# Altium PCB buck.PcbDoc
Units mil, origin at the board's own origin, x right, y up, seen from the top; angles counter-clockwise.
Board outline 3385 x 2755 mil, 2 copper layers (Top Layer, Bottom Layer); 40 components, 24 nets, 92 pads, 382 vias.
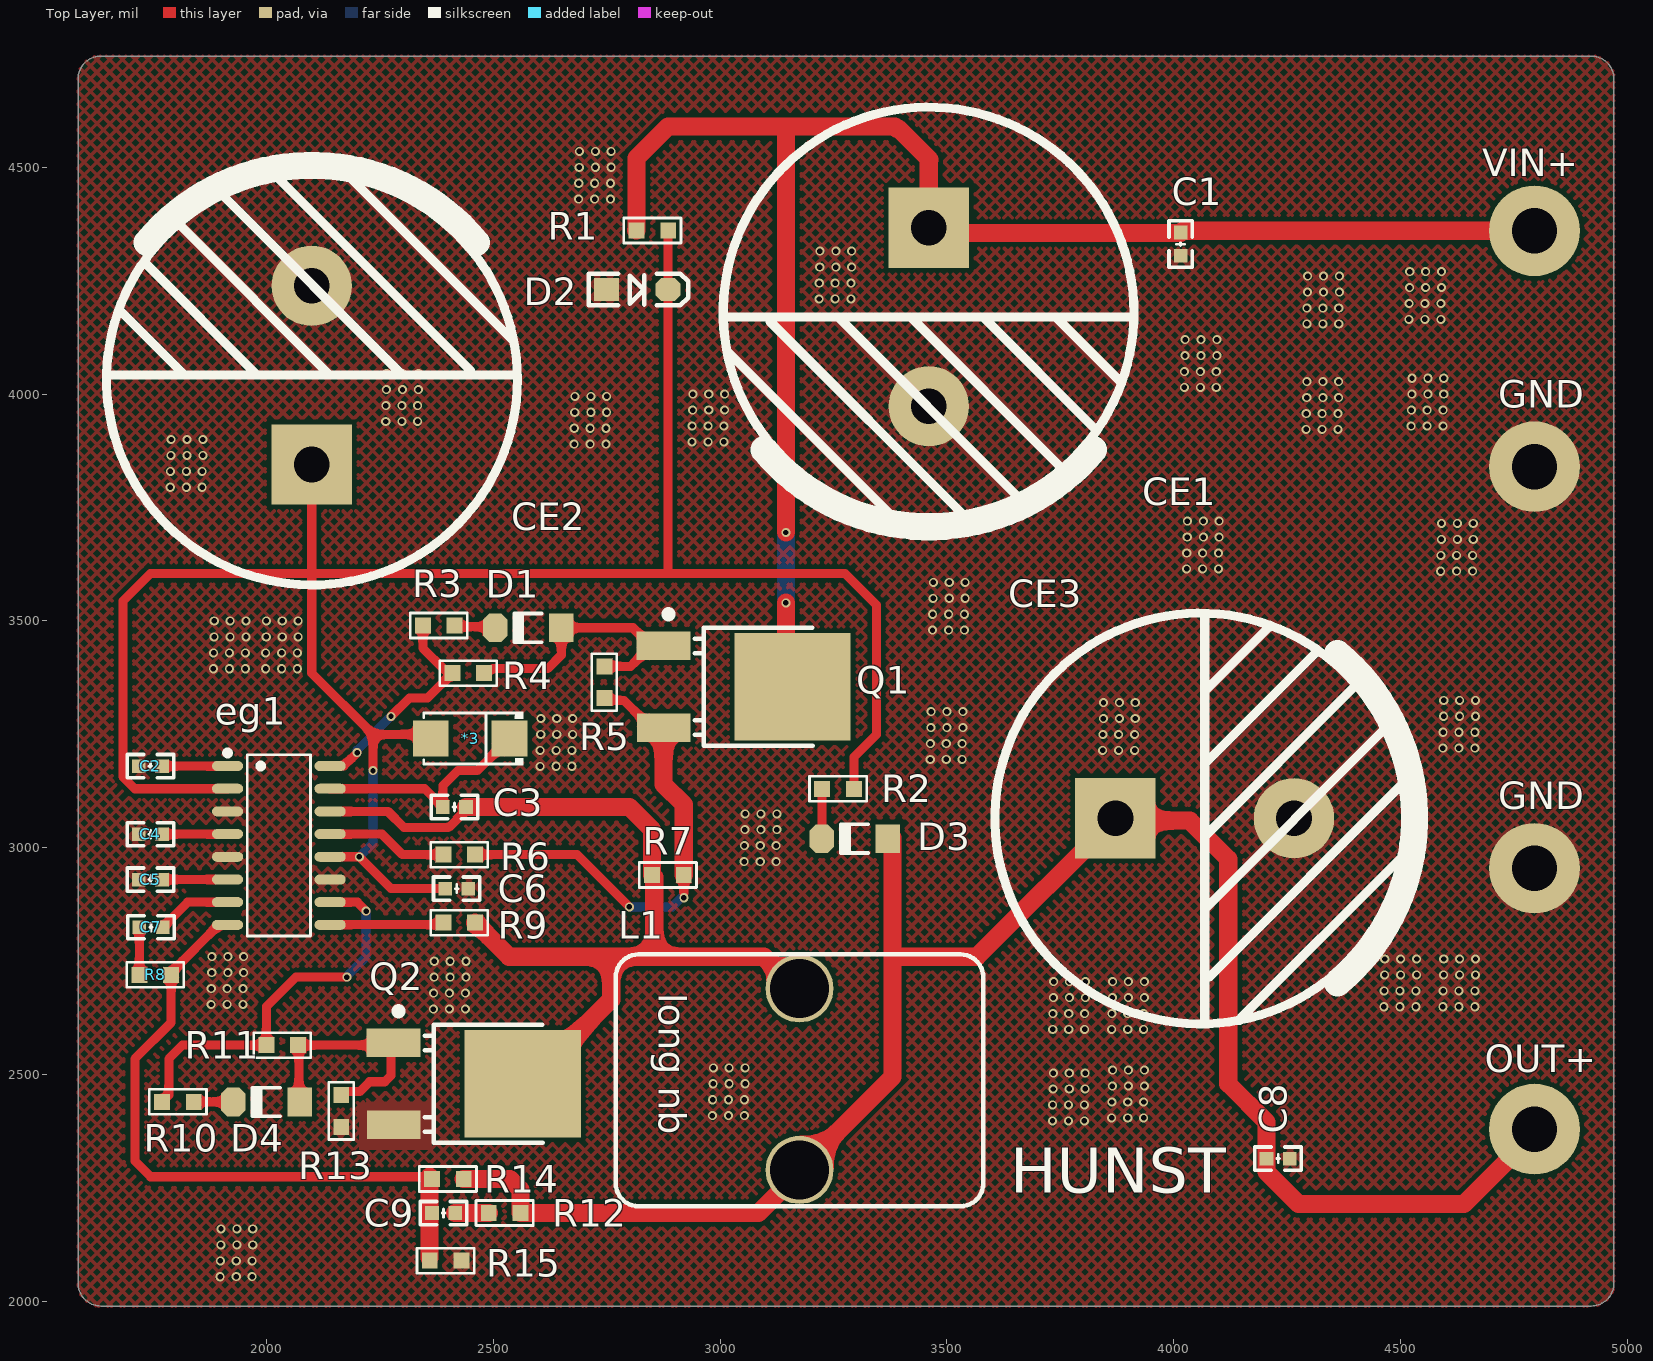
[diagram p0: Top Layer view]
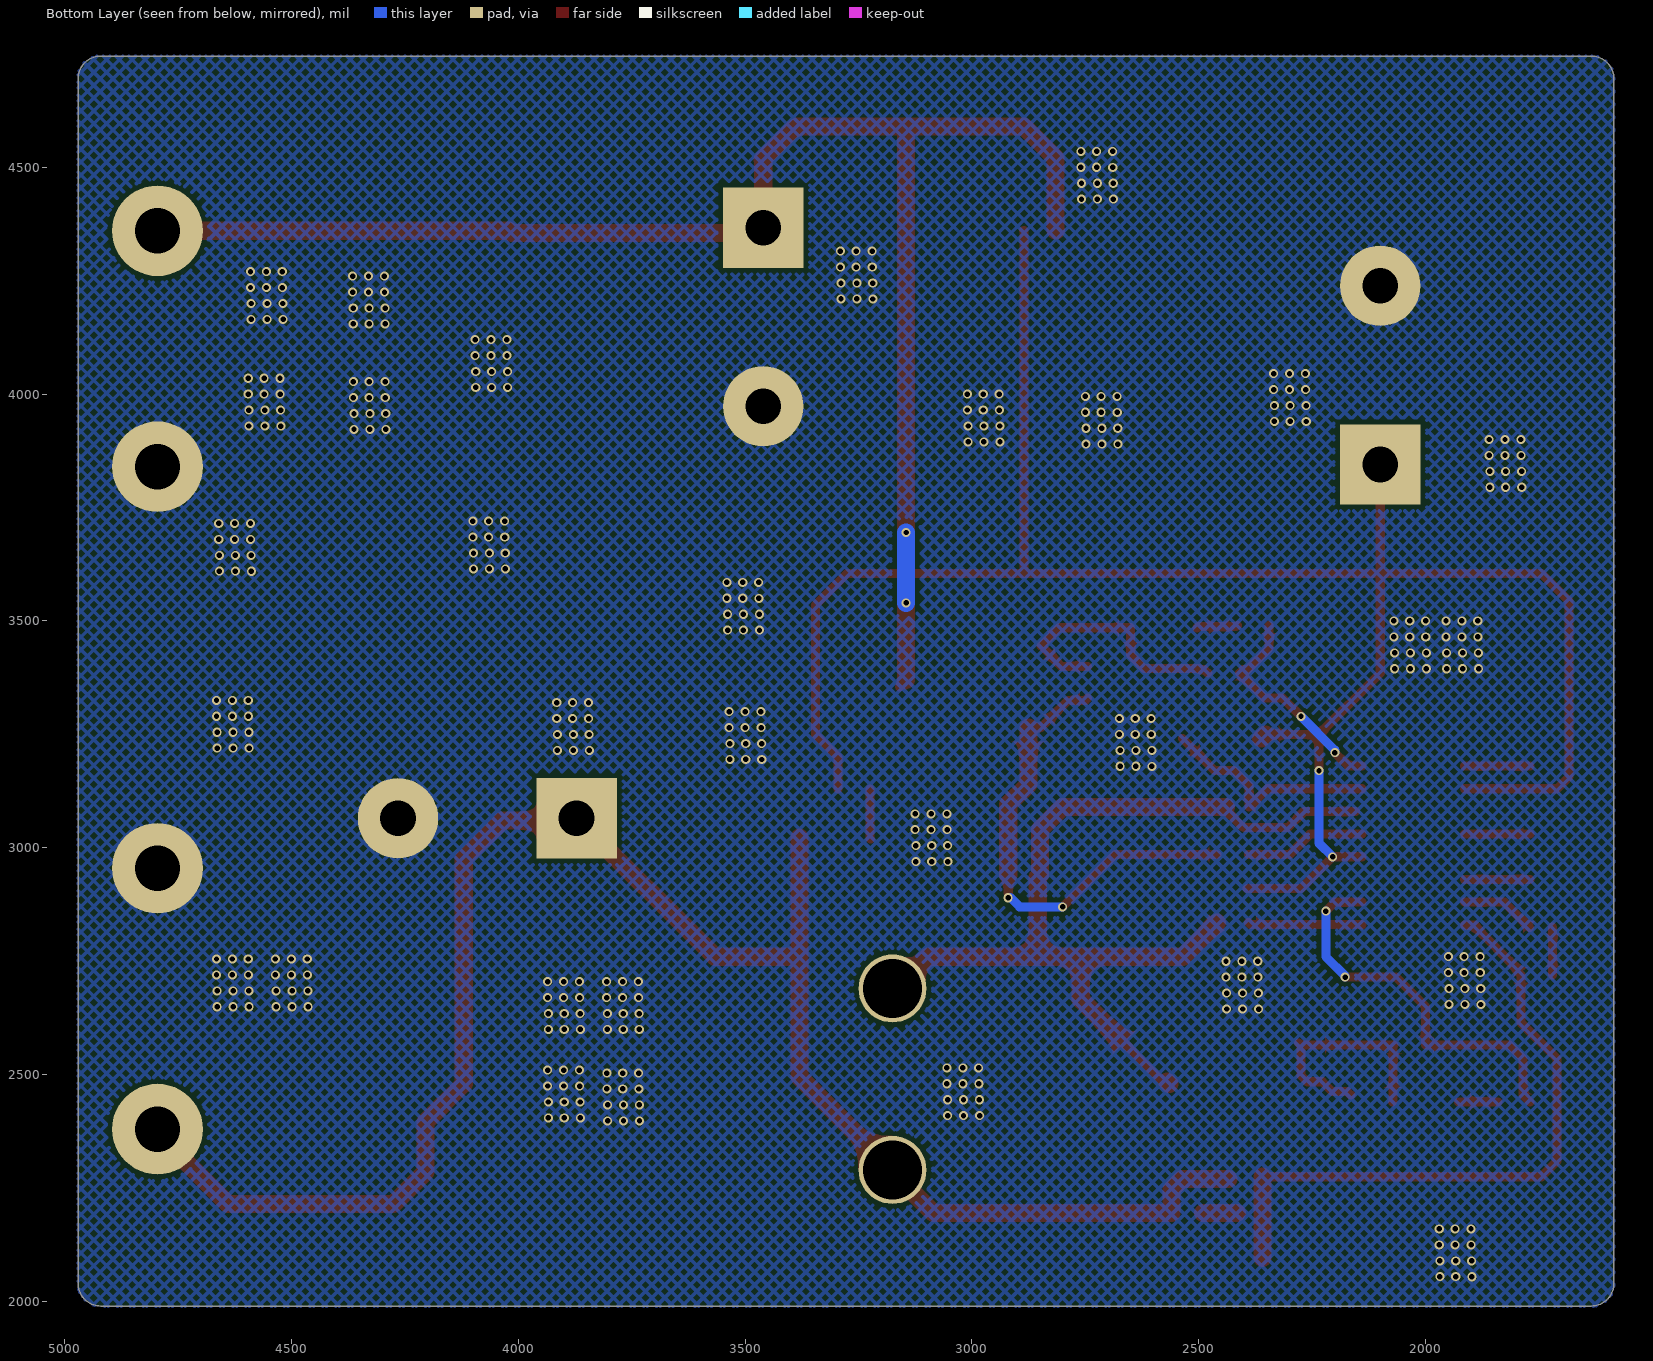
[diagram p1: Bottom Layer view, seen from below]
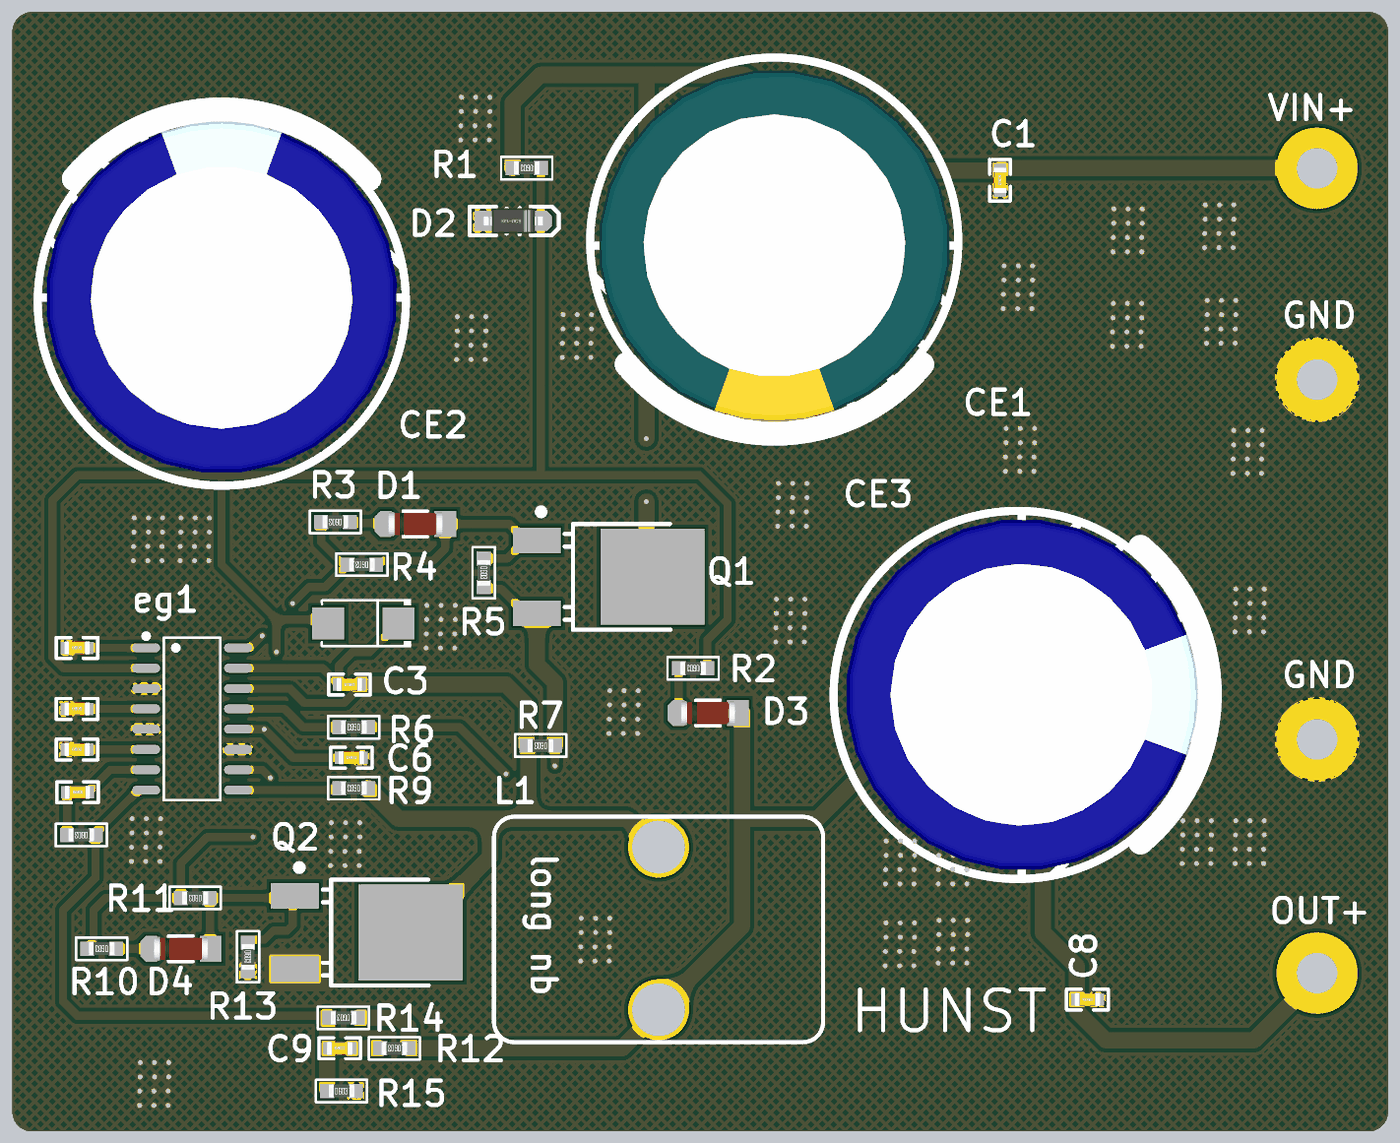
[diagram p2: 3D render of the assembled board from above, using the file's embedded part models]

## Layer stack, top to bottom
Top Solder: solder mask 0.4, Solder Resist, Dk 3.5
Top Layer: signal copper 1.4
Dielectric 1: dielectric 12.6, FR-4, Dk 4.8
Bottom Layer: signal copper 1.4
Bottom Solder: solder mask 0.4, Solder Resist, Dk 3.5

## Board outline
1635,1990 cw(c1635,2040) 1585,2040 1585,4695 cw(c1635,4695) 1635,4745 4920,4745 cw(c4920,4695) 4970,4695 4970,2040 cw(c4920,2040) 4920,1990

## Design rules (kind name [scope] priority, off if disabled: settings)
Clearance [All] p1: gap=10 ignorepadtopadclearanceinfootprint=FALSE except(0: Arc-Hole Track-Hole SMDPad-Hole THPad-Hole Via-Hole Fill-Hole Poly-Hole Region-Hole Text-Hole)
ComponentClearance [All] p1: gap=0 collisioncheckmode=3 verticalgap=10 showdistances=FALSE
Height [All] p1: minheight=0 maxheight=2000 prefheight=500
HoleSize [All] p1: absolutevalues=TRUE maxlimit=200 minlimit=1 maxpercent=80.000 minpercent=20.000
PolygonConnect PolygonConnect_1 [InNet('GND')] p1: connectstyle=Direct reliefconductorwidth=10 reliefentries=4 polygonreliefangle="90 Angle" airgapwidth=10
PolygonConnect [All] p2: connectstyle=Relief reliefconductorwidth=10 reliefentries=4 polygonreliefangle="90 Angle" airgapwidth=10
RoutingVias [All] p1: holewidth=28 width=50 viastyle="Through Hole" minholewidth=28 minwidth=50 maxholewidth=28 maxwidth=50
SilkToSilkClearance [All] p1: silktosilkclearance=0
SilkToSolderMaskClearance [IsPad] p1: minsilkscreentomaskgap=0 clearancetoexposedcopper=TRUE
SolderMaskExpansion [All] p1: expansion=4 istentingtop=FALSE
Width [All] p1: maxlimit=50 minlimit=20 preferedwidth=20 minimp=50.000000 maximp=50.000000 favimp=50.000000
25 further rules are at their usual default settings.

## Components (designator, comment, footprint, x,y, rotation, side; value= is the part's Value field where it differs from the comment)
*3 "SS520" SS520 2445,3235 r180 top
C1 "1uf/200V" "C 0603_L" 4015,4330.59 r90 top
C2 "1uf" "C 0603_L" 1744.42,3180 r0 top
C3 "1uf" "C 0603_L" 2414.41,3090 r180 top
C4 "100pf" "C 0603_L" 1744.42,3030 r0 top
C5 "200pf" "C 0603_L" 1744.41,2930 r0 top
C6 "0.1uf" "C 0603_L" 2419.41,2910 r0 top
C7 "10nf" "C 0603_L" 1745.6,2825 r0 top
C8 "1uf" "C 0603_L" 4230,2315 r180 top
C9 "10nf" "C 0603_L" 2390.59,2195 r0 top
CE1 "100uF/200V" "CAP 10*22*40 - GD" 3460,4170 r270 top
CE2 "22uf" "CAP 10*22*31.5" 2100,4041.85 r90 top
CE3 "1000uF/25V" "CAP 10*22*31.5" 4068.15,3065 r0 top
D1 "1N4148" "MINI_MELF (LL34)" 2576.97,3485 r180 top
D2 "稳压二极管" SOD-123 2817.5,4230.59 r0 top
D3 "1N4148" "MINI_MELF (LL34)" 3296.97,3020 r180 top
D4 "1N4148" "MINI_MELF (LL34)" 2000,2440 r180 top
eg1 "eg1163s" eg1163S 2035,3005 r270 top
GND "GND" 焊盘接口 4795,2955 r0 top (schematic designator *2)
GND "GND" 焊盘接口 4795,3840 r0 top (schematic designator *2)
L1 "220uh" 电感 3175,2490 r270 top
OUT+ "VO+19.2V" 焊盘接口 4795,2380 r0 top (schematic designator *4)
Q1 "IRFR220NTRPBF" IRFR220NTRPBF 2997.95,3354.99 r90 top
Q2 "IRFR220NTRPBF" IRFR220NTRPBF 2402.95,2479.99 r90 top
R1 "200K" "RES 0603" 2850.65,4360.59 r180 top
R2 "51R" "RES 0603" 3260,3130 r180 top
R3 "2R" "RES 0603" 2380,3490 r180 top
R4 "100R" "RES 0603" 2445,3385 r180 top
R5 "100K" "RES 0603" 2745,3365 r270 top
R6 "10K" "RES 0603" 2425,2985 r180 top
R7 "36mR" "RES 0603" 2885,2940 r180 top
R8 "100K" "RES 0603" 1755,2720 r180 top
R9 "100K" "RES 0603" 2425,2835 r180 top
R10 "2R" "RES 0603" 1805,2440 r180 top
R11 "100R" "RES 0603" 2035,2565 r180 top
R12 "1.5K" "RES 0603" 2525,2195 r180 top
R13 "100K" "RES 0603" 2165,2420 r270 top
R14 "18K" "RES 0603" 2400,2270 r180 top
R15 "1.2K" "RES 0603" 2395,2090 r0 top
VIN+ "VIN+150V" 焊盘接口 4795,4360 r0 top (schematic designator *1)

## Footprints (in the part's own frame and the unit in brackets; to place one, negate y for a bottom-side part, rotate by r counter-clockwise, add the part's x,y. Pads: shape width x height; smd on the part's side, far side on the other; paste and mask are expansions set on the pad)
"C 0603_L" [mil] "无极性贴片电容"
  rect 30x30 smd: 1(-25.59,0) 2(25.59,0)
  silkscreen extent -51,-26 51,26, body extent -31,-16 31,16, height 32
"CAP 10*22*31.5" [mm] "脚距10mm直径22mm高度31.5mm"
  rect 4.5x4.5 hole 2: 1(-5,0)
  round 4.5 hole 2: 2(5,0)
  silkscreen extent -11.75,-11.51 11.74,11.48, body extent -11,-11 11.01,11, height 31.53
"CAP 10*22*40 - GD" [mm] "脚距10mm直径22mm高度40mm"
  rect 4.5x4.5 hole 2: 1(-5,0)
  round 4.5 hole 2: 2(5,0)
  silkscreen extent -11.75,-11.51 11.74,11.49, body extent -11,-11 11.01,11, height 40.04
eg1163S [mm]
  oval 0.56x1.745 smd: 1(-4.452,-3.064) 2(-3.182,-3.064) 3(-1.912,-3.064) 4(-0.642,-3.064) 5(0.628,-3.064) 6(1.898,-3.064) 7(3.168,-3.064) 8(4.438,-3.064) 9(4.438,2.68) 10(3.168,2.68) 11(1.898,2.68) 12(0.628,2.68) 13(-0.642,2.68) 14(-1.912,2.68) 15(-3.182,2.68) 16(-4.452,2.68)
  silkscreen extent -5.33,-3.21 5.07,1.58
IRFR220NTRPBF [mm]
  rect 1.6x3 smd: 1(2.285,3.118) 3(-2.285,3.112)
  rect 6x6.5 smd: 2(0,-4.116)
  silkscreen extent -3.3,-5.24 4.26,3.04
"MINI_MELF (LL34)" [mm] "1.5*3.4mm(直径，脚距）"
  rect 1.37x1.62 smd: 1(-1.855,0)
  oct 1.37x1.62 smd: 2(1.855,0)
  silkscreen extent -0.76,-0.8 0.78,0.8, body extent -1.7,-0.75 1.7,0.75, height 1.5
"RES 0603" [mil] "Chip Resistor, 2-Leads, Body 1.60x0.80mm"
  rect 35x35 smd: 1(-35,0) 2(35,0)
  silkscreen extent -63,-28 63,28, body extent -31,-16 31,16, height 18
SOD-123 [mil] "2.7x1.6X1.1mm（长宽高，不包括引脚）"
  rect 55x50 smd: 1(-67.5,0)
  oct 55x50 smd: 2(67.5,0)
  silkscreen extent -108,-35 112,35, body extent -73,-31 73,31, height 48
SS520 [mm]
  rect 2x2 smd: 1(-2.302,-0.148) 2(2.098,-0.148)
  silkscreen extent -3.08,-1.65 2.5,1.35
焊盘接口 [mil]
  round 200 hole 100: 1(0,0)
电感 [mil]
  round 150 hole 130: 1(-200,0) 2(200,0)
  silkscreen extent -275,-405 280,405

## Part data
C1 C2 C3 C4 C5 C6 C7 C8 C9: library part C, "贴片电容", BOM名称=无极性贴片电容, 唯一出售店铺网址=https://shop463601444.taobao.com, 淘宝ID="封装库来自淘宝 ID：黄晶宝石", 联系售后，技术支持=https://shop463601444.taobao.com
CE1 CE2 CE3: library part CE, "直插电解电容", BOM名称=直插电解电容, 淘宝ID="封装库来自淘宝 ID：黄晶宝石", 联系售后=https://shop463601444.taobao.com
D1 D3 D4: "开关二极管", BOM名称=高速开关二极管, 欢迎光临=https://shop463601444.taobao.com, 淘宝ID="封装库来自淘宝 ID：黄晶宝石"
D2: "Zener Diode", 封装库来自淘宝卖家 ID：黄晶宝石=其他店铺购入均为盗版，不享受售后技术支持服务，请立即申请退款
GND GND OUT+ VIN+: library part 焊盘接口
L1: library part 电感
Q1 Q2: Continuous Drain Current (Id)=5A, Drain Source On Resistance (RDS(on)@Vgs,Id)=600mΩ@10V,2.9A, Drain Source Voltage (Vdss)=200V, Gate Threshold Voltage (Vgs(th)@Id)=4V@250uA, Input Capacitance (Ciss@Vds)=300pF@25V, LCSC Part Name="1个N沟道 耐压:200V 电流:5A", Manufacturer=Infineon(英飞凌), Operating Temperature=-55℃~+175℃@(Tj), Power Dissipation (Pd)=43W, Add into BOM=yes, Convert to PCB=yes, Datasheet=https://atta.szlcsc.com/upload/public/pdf/source/20200323/C500528_AD38F318A115118F4DB56F5A4EA6919E.pdf, Device=IRFR220NTRPBF, Manufacturer Part=IRFR220NTRPBF, Name=IRFR220NTRPBF, Supplier=LCSC, Supplier Footprint=TO-252-2(DPAK), Supplier Part=C2584, Symbol=IRFR220N, Total Gate Charge (Qg@Vgs)=23nC@10V, Type=1个N沟道
R1 R2 R3 R4 R5 R6 R7 R8 R9 R10 R11 R12 R13 R14 R15: library part R, "贴片电阻", BOM名称=贴片电阻, 封装库来自淘宝卖家 ID：黄晶宝石=其他店铺购入均为盗版，不享受售后技术支持服务，请立即申请退款, 版权归属="来自淘宝 ID：黄晶宝石", 联系售后=https://shop463601444.taobao.com

## Via types
v1: diameter 20, hole 12, Top Layer to Bottom Layer, tented both sides, 382 vias

## Nets (pads, with @x,y where several pads share a name; then routed paths per layer and width w, separated by ;. In a path a pad name is that pad's centre, name@x,y a point inside that pad or via, vN(x,y) a via of type N, cw(c..) or ccw(c..) an arc to the next point about the centre after c; other vN are vias at no path point)
+5: C2.2 eg1.1 | length 144.5
  Top Layer w20: C2.2 1770.13,3180.13 1914.22,3180.13 eg1.1
GND: C1.1 C2.1 C4.1 C5.1 C6.2 C8.1 CE1.2 CE2.2 CE3.2 D2.1 eg1.3 eg1.5 eg1.11 GND.1 Q2.3 R13.2 R15.2
  other v1: 1898.12,2054.65 1933.49,2054.73 1968.49,2054.73 1898.49,2089.73 1933.49,2089.73 1968.49,2089.73 1899.63,2124.92 1935,2125 1970,2125 1900,2160 1935,2160 1970,2160 3732.6,2398.19 3767.97,2398.27 3802.97,2398.27 3863.12,2404.65 3898.49,2404.73 3933.49,2404.73 2983.12,2409.65 3018.49,2409.73 3053.49,2409.73 3732.97,2433.27 3767.97,2433.27 3802.97,2433.27 3863.49,2439.73 3898.49,2439.73 3933.49,2439.73 2983.49,2444.73 3018.49,2444.73 3053.49,2444.73 3734.11,2468.46 3769.48,2468.54 3804.48,2468.54 3864.63,2474.92 3900,2475 3935,2475 2984.63,2479.92 3020,2480 3055,2480 3734.48,2503.54 3769.48,2503.54 3804.48,2503.54 3865,2510 3900,2510 3935,2510 2985,2515 3020,2515 3055,2515 3733.12,2599.65 3768.49,2599.73 3803.49,2599.73 3863.12,2599.65 3898.49,2599.73 3933.49,2599.73 3733.49,2634.73 3768.49,2634.73 3803.49,2634.73 3863.49,2634.73 3898.49,2634.73 3933.49,2634.73 2368.12,2644.65 2403.49,2644.73 2438.49,2644.73 4463.12,2649.65 4498.49,2649.73 4533.49,2649.73 4593.12,2649.65 4628.49,2649.73 4663.49,2649.73 1878.12,2654.65 1913.49,2654.73 1948.49,2654.73 3734.63,2669.92 3770,2670 3805,2670 3864.63,2669.92 3900,2670 3935,2670 2368.49,2679.73 2403.49,2679.73 2438.49,2679.73 4463.49,2684.73 4498.49,2684.73 4533.49,2684.73 4593.49,2684.73 4628.49,2684.73 4663.49,2684.73 1878.49,2689.73 1913.49,2689.73 1948.49,2689.73 3735,2705 3770,2705 3805,2705 3865,2705 3900,2705 3935,2705 2369.63,2714.92 2405,2715 2440,2715 4464.63,2719.92 4500,2720 4535,2720 4594.63,2719.92 4630,2720 4665,2720 1879.63,2724.92 1915,2725 1950,2725 2370,2750 2405,2750 2440,2750 4465,2755 4500,2755 4535,2755 4595,2755 4630,2755 4665,2755 1880,2760 1915,2760 1950,2760 3053.12,2969.65 3088.49,2969.73 3123.49,2969.73 3053.49,3004.73 3088.49,3004.73 3123.49,3004.73 3054.63,3039.92 3090,3040 3125,3040 3055,3075 3090,3075 3125,3075 2603.12,3179.65 2638.49,3179.73 2673.49,3179.73 3463.12,3194.65 3498.49,3194.73 3533.49,3194.73 2603.49,3214.73 2638.49,3214.73 2673.49,3214.73 3843.12,3214.65 3878.49,3214.73 3913.49,3214.73 4593.12,3219.65 4628.49,3219.73 4663.49,3219.73 3463.49,3229.73 3498.49,3229.73 3533.49,3229.73 2604.63,3249.92 2640,3250 2675,3250 3843.49,3249.73 3878.49,3249.73 3913.49,3249.73 4593.49,3254.73 4628.49,3254.73 4663.49,3254.73 3464.63,3264.92 3500,3265 3535,3265 2605,3285 2640,3285 2675,3285 3844.63,3284.92 3880,3285 3915,3285 4594.63,3289.92 4630,3290 4665,3290 3465,3300 3500,3300 3535,3300 3845,3320 3880,3320 3915,3320 4595,3325 4630,3325 4665,3325 1883.12,3394.65 1918.49,3394.73 1953.49,3394.73 1998.12,3394.65 2033.49,3394.73 2068.49,3394.73 1883.49,3429.73 1918.49,3429.73 1953.49,3429.73 1998.49,3429.73 2033.49,3429.73 2068.49,3429.73 1884.63,3464.92 1920,3465 1955,3465 1999.63,3464.92 2035,3465 2070,3465 3468.12,3479.65 3503.49,3479.73 3538.49,3479.73 1885,3500 1920,3500 1955,3500 2000,3500 2035,3500 2070,3500 3468.49,3514.73 3503.49,3514.73 3538.49,3514.73 3469.63,3549.92 3505,3550 3540,3550 3470,3585 3505,3585 3540,3585 4588.12,3609.65 4623.49,3609.73 4658.49,3609.73 4028.12,3614.65 4063.49,3614.73 4098.49,3614.73 4588.49,3644.73 4623.49,3644.73 4658.49,3644.73 4028.49,3649.73 4063.49,3649.73 4098.49,3649.73 4589.63,3679.92 4625,3680 4660,3680 4029.63,3684.92 4065,3685 4100,3685 4590,3715 4625,3715 4660,3715 4030,3720 4065,3720 4100,3720 1788.12,3794.65 1823.49,3794.73 1858.49,3794.73 1788.49,3829.73 1823.49,3829.73 1858.49,3829.73 1789.63,3864.92 1825,3865 1860,3865 2678.12,3889.65 2713.49,3889.73 2748.49,3889.73 2938.12,3894.65 2973.49,3894.73 3008.49,3894.73 1790,3900 1825,3900 1860,3900 4291.56,3922.13 4326.93,3922.21 4361.93,3922.21 2678.49,3924.73 2713.49,3924.73 2748.49,3924.73 2938.49,3929.73 2973.49,3929.73 3008.49,3929.73 4523.12,3929.65 4558.49,3929.73 4593.49,3929.73 2263.12,3939.65 2298.49,3939.73 2333.49,3939.73 4291.93,3957.21 4326.93,3957.21 4361.93,3957.21 2679.63,3959.92 2715,3960 2750,3960 2939.63,3964.92 2975,3965 3010,3965 4523.49,3964.73 4558.49,3964.73 4593.49,3964.73 2263.49,3974.73 2298.49,3974.73 2333.49,3974.73 4293.07,3992.4 4328.44,3992.48 4363.44,3992.48 2680,3995 2715,3995 2750,3995 2940,4000 2975,4000 3010,4000 4524.63,3999.92 4560,4000 4595,4000 2264.63,4009.92 2300,4010 2335,4010 4023.12,4014.65 4058.49,4014.73 4093.49,4014.73 4293.44,4027.48 4328.44,4027.48 4363.44,4027.48 4525,4035 4560,4035 4595,4035 2265,4045 2300,4045 2335,4045 4023.49,4049.73 4058.49,4049.73 4093.49,4049.73 4024.63,4084.92 4060,4085 4095,4085 4025,4120 4060,4120 4095,4120 4293.12,4154.65 4328.49,4154.73 4363.49,4154.73 4518.12,4164.65 4553.49,4164.73 4588.49,4164.73 4293.49,4189.73 4328.49,4189.73 4363.49,4189.73 4518.49,4199.73 4553.49,4199.73 4588.49,4199.73 3218.12,4209.65 3253.49,4209.73 3288.49,4209.73 4294.63,4224.92 4330,4225 4365,4225 4519.63,4234.92 4555,4235 4590,4235 3218.49,4244.73 3253.49,4244.73 3288.49,4244.73 4295,4260 4330,4260 4365,4260 4520,4270 4555,4270 4590,4270 3219.63,4279.92 3255,4280 3290,4280 3220,4315 3255,4315 3290,4315 2688.12,4429.65 2723.49,4429.73 2758.49,4429.73 2688.49,4464.73 2723.49,4464.73 2758.49,4464.73 2689.63,4499.92 2725,4500 2760,4500 2690,4535 2725,4535 2760,4535
kuan: 
Net*1_1: C1.2 CE1.1 Q1.2 R1.2 VIN+.1 | length 3628.2
  Top Layer w20: Q1.2@3145,3370 Q1.2
  Top Layer w40: R1.2@2815,4361.25 R1.2 2815.65,4520.65 2885,4590 3145,4590 ; Q1.2@3145,3370 v1(3145,3540) ; v1(3145,3695) 3145,4590 ; VIN+.1 4020,4360 4015,4355 3471.85,4355 CE1.1 3460,4515 3461.72,4516.72 3393.43,4585 3390,4585 3385,4590 3145,4590 ; VIN+.1@4849,4380 VIN+.1@4869,4360
  Bottom Layer w40: v1(3145,3540) v1(3145,3695)
Net*3_1: *3.1 C3.2 eg1.15 | length 501.7
  Top Layer w20: eg1.15 2348.56,3130.26 C3.2 2388.82,3136.91 2421.91,3170 2464.79,3170 *3.1
Net*3_2: *3.2 C6.1 CE2.1 D2.2 eg1.2 eg1.12 R1.1 R2.1 | length 4871.8
  Top Layer w20: eg1.2 1710.27,3130.26 1683.82,3156.71 1683.82,3543.82 1745,3605 2100,3605 ; CE2.1@2100,3835 2100,3605 ; CE2.1 CE2.1@2110,3835 ; eg1.12 2204.74,2980.26 v1(2205,2980) 2275,2910 C6.1 ; v1@2235,3175 2235,3250 ; *3.2@2353.24,3250 2235,3250 ; R1.1 2885.33,4360.26 2885.33,4230.92 D2.2 2885,3605 ; R2.1 3295,3200 3345,3250 3345,3535 3275,3605 2885,3605 ; 2100,3605 2885,3605 ; 2100,3605 2100,3385 2235,3250
  Top Layer w40: *3.2@2353.24,3250 *3.2
  Bottom Layer w20: v1(2205,2980) 2235,3010 v1(2235,3170)
Net*4_1: C8.2 CE3.1 D3.1 L1.2 OUT+.1 R12.1 R14.1 | length 4092.8
  Top Layer w20: OUT+.1@4869,2390 OUT+.1@4879,2380
  Top Layer w40: R14.1 2536.57,2270 2560,2246.57 R12.1 3085,2195 3175,2285 L1.2 3380,2495 3380,2760 ; D3.1@3380,3023.03 3380,2760 ; OUT+.1 4795,2370 4640,2215 4274.72,2215 4204.41,2285.3 C8.2 4204.41,2395.59 4120,2480 4120,2975 4035,3060 3876.3,3060 CE3.1 3566.3,2760 3380,2760 ; OUT+.1@4825.7,2380 4825.7,2405.7 4825.86,2405.86 OUT+.1@4825.86,2336.86
NetC3_1: C3.1 eg1.14 L1.1 Q2.2 R7.2 R9.1 | length 2166.8
  Top Layer w20: eg1.14@2154.88,3080 2268.06,3080 2303.06,3045 2400,3045 2400.62,3045.62 2402.73,3045.62 2435,3077.9 2435,3085 2436.39,3086.39 C3.1@2441.39,3086.39 ; Q2.2@2574.84,2480 Q2.2@2682.95,2588.11
  Top Layer w40: C3.1 2800,3090 2850,3040 R7.2 ; R9.1 2535.01,2760 2760,2760 ; Q2.2 Q2.2@2570,2485 ; Q2.2@2682.95,2588.11 2760,2665.16 2760,2760 ; R7.2@2855,2935 2855,2760 ; L1.1 3166.57,2690 3096.57,2760 2855,2760 ; 2760,2760 2855,2760
NetC4_2: C4.2 eg1.4 | length 144.5
  Top Layer w20: C4.2 1770.13,3030.13 1914.22,3030.13 eg1.4
NetC5_2: C5.2 eg1.6 | length 144.5
  Top Layer w20: C5.2 1770.13,2930.13 1914.22,2930.13 eg1.6
NetC7_1: C7.1 R8.2 | length 105
  Top Layer w20: R8.2 1720,2727.5 1720,2778.75 C7.1
NetC7_2: C7.2 eg1.7 | length 166.1
  Top Layer w20: C7.2 1826.44,2880.26 eg1.7
NetC9_1: C9.1 eg1.8 R8.1 R14.2 R15.1 | length 1463.2
  Top Layer w20: eg1.8 1891.58,2830.26 1890.64,2829.31 1890.64,2825.64 1797.5,2732.5 1797.5,2727.5 R8.1 1790,2615 1710,2535 1710,2310 1745,2275 R14.2@2359.41,2275 ; R15.1@2359.41,2094.41 2358.82,2095 R15.1@2359.41,2095.59
  Top Layer w40: R15.1@2359.41,2095.59 R14.2@2359.41,2275
NetC9_2: C9.2 R12.2 | length 73.8
  Top Layer w40: C9.2 R12.2
NetD1_1: D1.1 Q1.1 R4.1 R5.1 | length 582
  Top Layer w20: R4.1 2487.5,3392.5 2496.72,3392.5 2499.22,3395 2620,3395 2650,3425 D1.1 2807.57,3485 2847.62,3444.95 2802.67,3400 R5.1
NetD1_2: D1.2 R3.1 | length 91
  Top Layer w20: R3.1 2417.5,3487.5 2501.44,3487.5 D1.2
NetD3_2: D3.2 R2.2 | length 110.4
  Top Layer w20: D3.2 3224.47,3020.53 3224.47,3129.47 R2.2
NetD4_1: D4.1 Q2.1 R11.1 R13.1 | length 533.1
  Top Layer w20: D4.1 2071.52,2441.52 2071.52,2563.48 R11.1 Q2.1@2275.23,2565 ; R13.1 2172.5,2462.5 2205.74,2462.5 2227.67,2484.43 2260.86,2484.43 2275,2498.57 2275,2564.77 Q2.1@2275.23,2565 ; Q2.1 Q2.1@2275.23,2565
NetD4_2: D4.2 R10.1 | length 87
  Top Layer w20: R10.1 D4.2
Neteg1_9: eg1.9 R9.2 | length 251.4
  Top Layer w20: eg1.9 2140.93,2830.65 2385.65,2830.65 R9.2
Neteg1_10: eg1.10 R10.2 R11.2 | length 868.9
  Top Layer w20: R10.2 1785,2455 1785,2535 1815,2565 R11.2 2000,2650 2065,2715 v1(2177.5,2715) ; eg1.10 2200.39,2880.26 v1(2220,2860.65)
  Bottom Layer w20: v1(2177.5,2715) 2177.5,2717.5 2220,2760 v1(2220,2860.65)
Neteg1_13: eg1.13 R6.2 | length 268.2
  Top Layer w20: eg1.13 2254.77,3030.26 2300.03,2985 R6.2
Neteg1_16: eg1.16 R3.2 R4.2 | length 495
  Top Layer w20: eg1.16 2140.93,3180.65 2170.65,3180.65 v1(2200,3210) ; v1(2274.62,3289.62) 2315,3330 2355,3330 R4.2 2402.5,3392.5 2392.5,3392.5 2345,3440 R3.2
  Bottom Layer w20: v1(2200,3210) 2200,3215 v1(2274.62,3289.62)
NetQ1_3: Q1.3 R5.2 R6.1 R7.1 | length 1052.9
  Top Layer w20: R6.1 2685,2985 v1(2800,2870) ; R5.2 2750,3325 2787.9,3325 2847.88,3265.02 Q1.3 ; 2920,2900 R7.1
  Top Layer w40: Q1.3 2875.44,3139.56 2920,3095 R7.1
  Bottom Layer w20: v1(2800,2870) 2895,2870 v1@2915.79,2890.79
  other v1: 2920,2890

## Polygon pours and split planes (outlines as drawn)
GND on Bottom Layer "Top Layer-No Net" (hatched 45Degree grid 20 track 8, pour order 11): 1635,1990 cw(c1635,2040) 1585,2040 1585,4695 cw(c1635,4695) 1635,4745 4920,4745 cw(c4920,4695) 4970,4695 4970,2040 cw(c4920,2040) 4920,1990
GND on Top Layer "NONET_L-01_P-001" (solid, pour order 13): 2200,2405 2200,2420 2225,2445 2230,2440 2365,2440 2365,2340 2360,2335 2205,2335 2205,2405 2195,2415
GND on Top Layer "Top Layer-No Net1" (hatched 45Degree grid 20 track 8, pour order 12): 1635,1990 cw(c1635,2040) 1585,2040 1585,4695 cw(c1635,4695) 1635,4745 4920,4745 cw(c4920,4695) 4970,4695 4970,2040 cw(c4920,2040) 4920,1990

## Silkscreen, mask and mechanical layers (free items; w line width, h text height)
Top Overlay:
  text "HUNST" at 3640,2240.03 h100
Mechanical 1:
  lines w10: 1585,2040 ccw(c1635,2040) 1635,1990 4920,1990 ccw(c4920,2040) 4970,2040 4970,4695 ccw(c4920,4695) 4920,4745 4745,4745 1635,4745 ccw(c1635,4695) 1585,4695 1585,2040

## Text inside footprints (layer, text, board x,y; h text height)
L1: Top Overlay "long nb" at 2865.02,2680 h60 r270